# Altium PCB buck_pcb_onur.PcbDoc
Units mm, origin at the board's own origin, x right, y up, seen from the top; angles counter-clockwise.
Board outline 38.86 x 22.61 mm, 2 copper layers (Top Layer, Bottom Layer); 7 components, 5 nets, 22 pads, 0 vias.
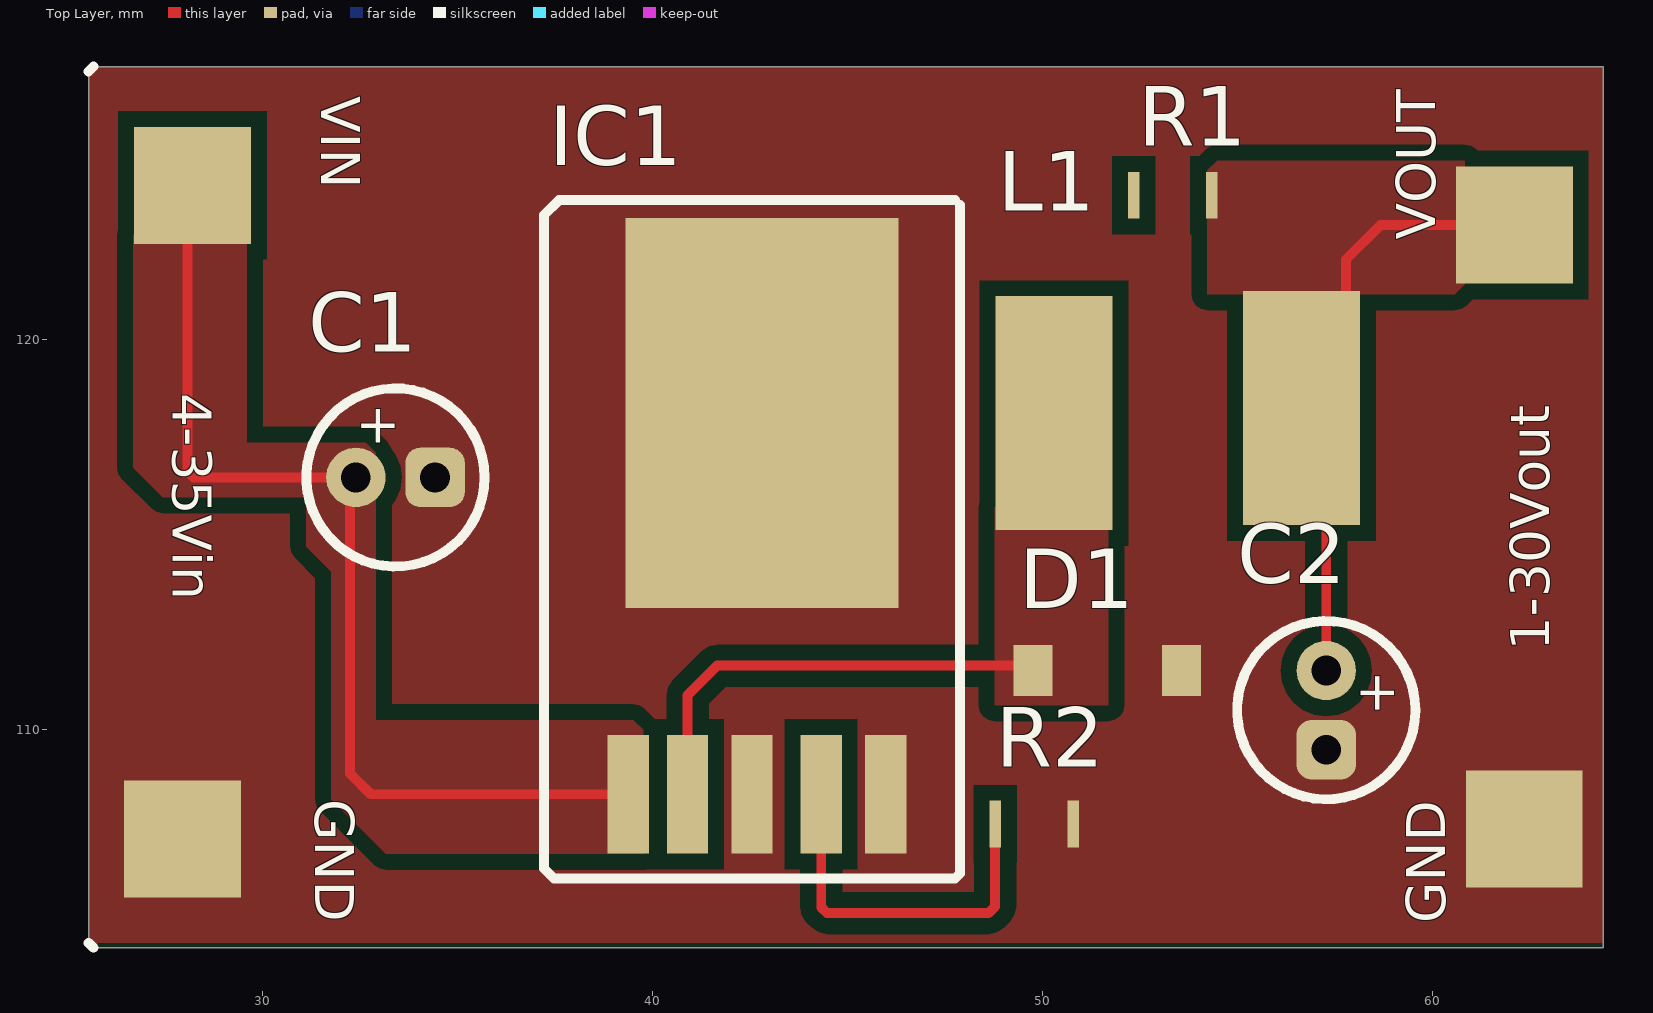
[diagram p0: Top Layer view]
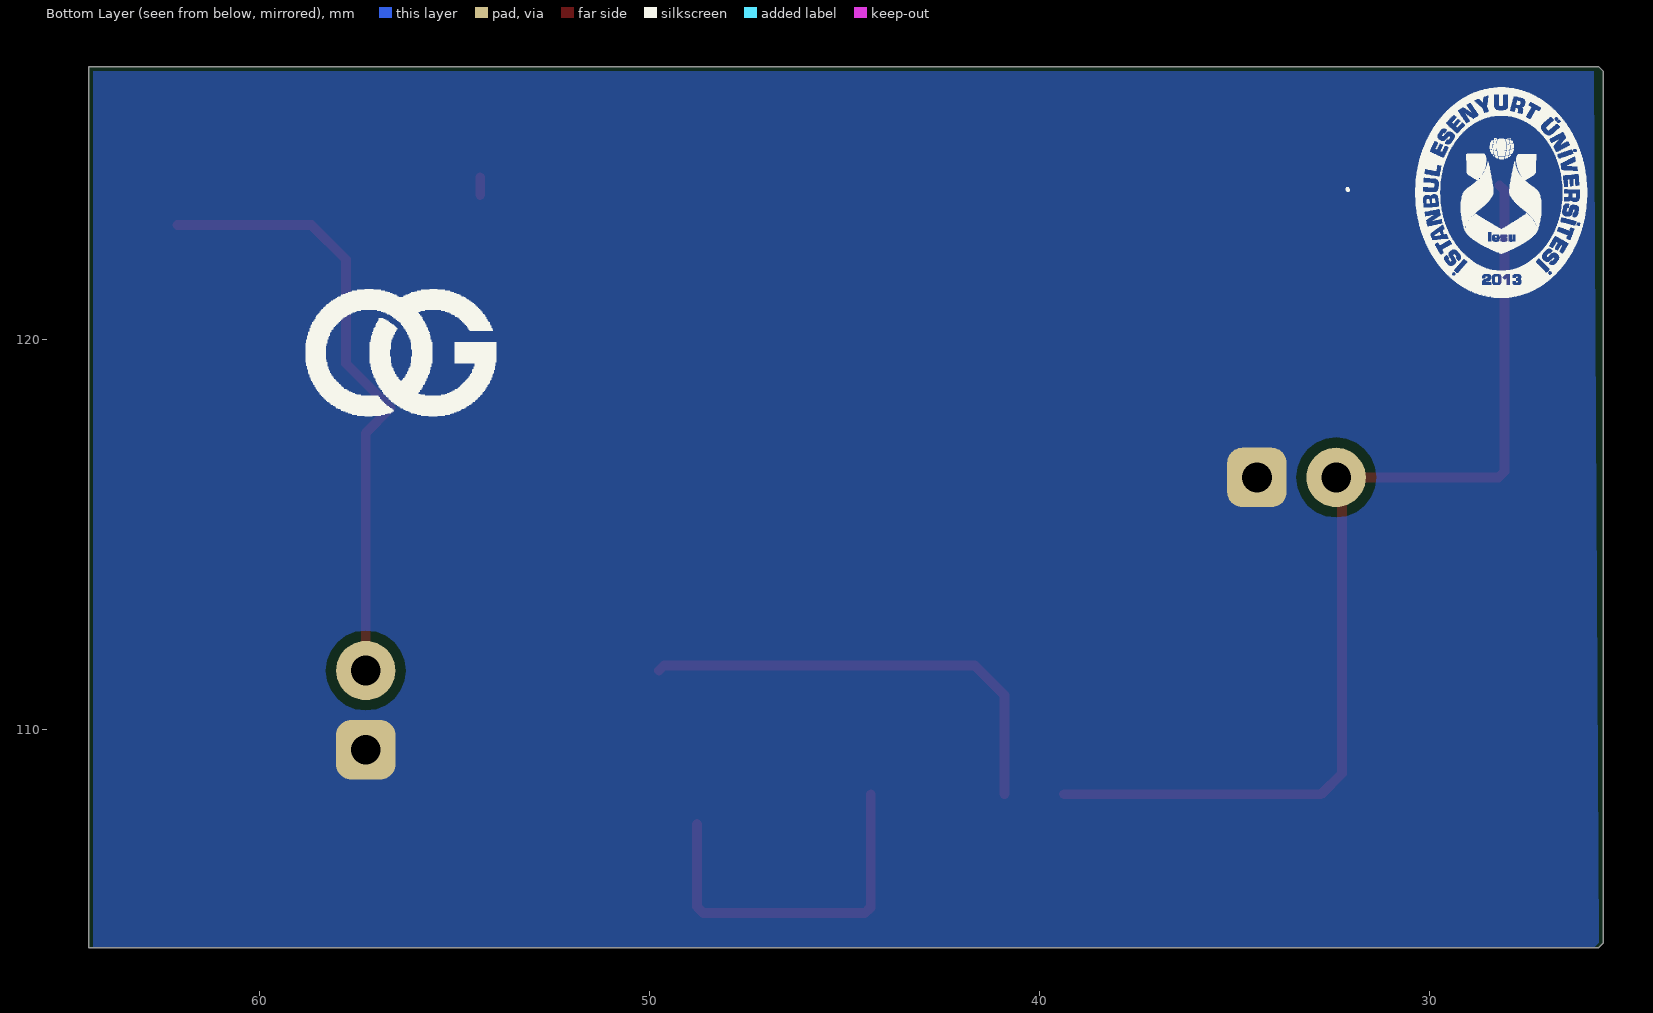
[diagram p1: Bottom Layer view, seen from below]
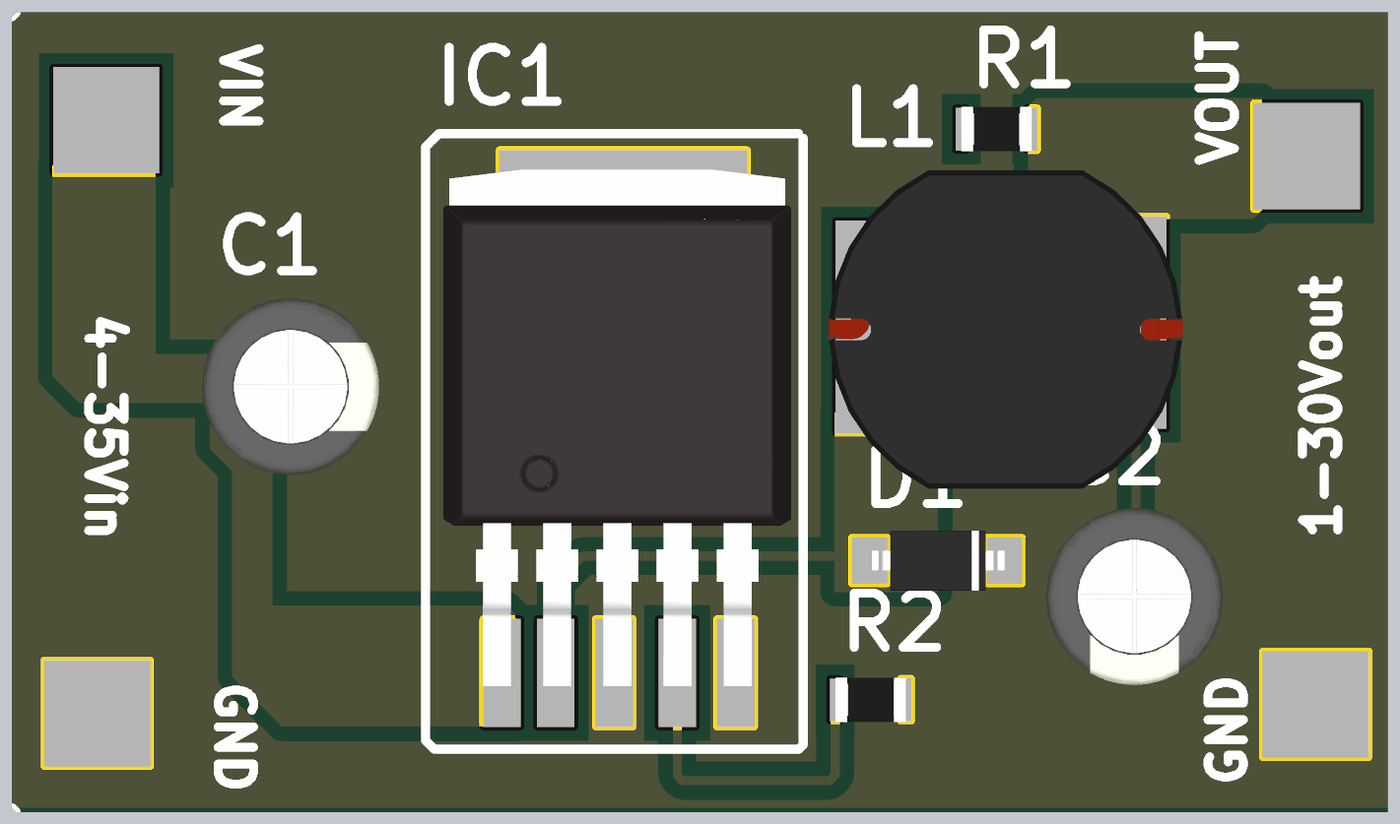
[diagram p2: 3D render of the assembled board from above, using the file's embedded part models]

## Layer stack, top to bottom
Top Solder: solder mask 0.0102, Solder Resist, Dk 3.5
Top Layer: signal copper 0.0356
Dielectric 1: dielectric 0.32, FR-4, Dk 4.8
Bottom Layer: signal copper 0.0356
Bottom Solder: solder mask 0.0102, Solder Resist, Dk 3.5

## Board outline
25.654,104.394 25.527,104.521 25.527,126.873 25.654,127 64.389,127 64.389,104.394

## Design rules (kind name [scope] priority, off if disabled: settings)
Clearance polygonclearance [InNamedPolygon('GND_L01_P010')] p1: gap=0.4 ignorepadtopadclearanceinfootprint=FALSE
Clearance Clearance_1 [All] p2: gap=0.254 ignorepadtopadclearanceinfootprint=FALSE except(0: Arc-Hole Track-Hole SMDPad-Hole THPad-Hole Via-Hole Fill-Hole Poly-Hole Region-Hole Text-Hole)
PolygonConnect [All] p1: connectstyle=Direct reliefconductorwidth=0.254 reliefentries=4 polygonreliefangle="90 Angle" airgapwidth=0.254
RoutingVias [All] p1: holewidth=0.711 width=1.27 viastyle="Through Hole" minholewidth=0.711 minwidth=1.27 maxholewidth=0.711 maxwidth=1.27
SolderMaskExpansion [All] p1: expansion=0.102
Width [All] p1: maxlimit=0.254 minlimit=0.254 preferedwidth=0.254
30 further rules are at their usual default settings.

## Classes and differential pairs
component class buck_sch: C1 C2 D1 IC1 L1 R1

## Components (designator, comment, footprint, x,y, rotation, side; value= is the part's Value field where it differs from the comment)
C1 "100uF 30V" "100uF through hole" 28.702,118.618 r0 top
C2 "220uF 35V" "100uF through hole" 59.436,115.189 r270 top
D1 "1N5822 smd" 1N5822 51.689,111.506 r180 top
IC1 "LM2596S" LM2596 42.164,113.284 r0 top
L1 "33uH" "33uH smd Inductor" 53.34,121.793 r0 top
R1 "10k 805" 805Res 53.34,123.698 r0 top
R2 "4R7 805" 805Res 49.784,107.569 r180 top

## Footprints (in the part's own frame and the unit in brackets; to place one, negate y for a bottom-side part, rotate by r counter-clockwise, add the part's x,y. Pads: shape width x height; smd on the part's side, far side on the other; paste and mask are expansions set on the pad)
1N5822 [mm]
  rect 1x1.3 smd: A(-1.875,0) K(1.935,0)
  body extent -1.87,-0.85 1.88,0.85, height 1.2
"33uH smd Inductor" [mm]
  rect 3x6 smd: 1(-3.048,-3.683) 2(3.302,-3.556)
  body extent -4.75,-8.25 5.25,0.74, height 5.44
"100uF through hole" [mil]
  round 60 hole 30: 1(145,-85)
  rrect50% 60x60 hole 30: 2(225,-85)
  silkscreen extent 95,-175 275,5, body extent 87,-185 283,12, height 433
805Res [mm]
  rect 0.3x1.2 smd: 1(-1,0) 2(1,0)
  body extent -1,-0.62 1,0.63, height 0.51
LM2596 [mm] "D2PAK"
  rect 1.06x3.05 smd: 1(-2.794,-4.953) 2(-1.27,-4.953) 3(0.381,-4.953) 4(2.159,-4.953) 5(3.81,-4.953)
  rect 7x10 smd: 3(0.635,4.826)
  silkscreen extent -4.95,-7.11 5.71,10.29, body extent -4.44,-5.33 5.38,9.27, height 4.22

## Part data
R1: library part "Resistor 10k"

## Free pads (board coordinates)
  rect 3x3 smd: 11(28.194,123.952) 12(27.94,107.188) 13(62.103,122.936) 14(62.357,107.442)

## Nets (pads, with @x,y where several pads share a name; then routed paths per layer and width w, separated by ;. In a path a pad name is that pad's centre, name@x,y a point inside that pad or via, vN(x,y) a via of type N, cw(c..) or ccw(c..) an arc to the next point about the centre after c; other vN are vias at no path point)
GND: C1.2 C2.2 D1.A IC1.3 IC1.5 pad.12 pad.14 R2.1
NetD1_K: D1.K IC1.2 L1.1 | length 11.8
  Top Layer w0.254: IC1.2 40.894,110.871 41.656,111.633 49.627,111.633 D1.K
NetIC1_4: IC1.4 R2.2 | length 9.6
  Top Layer w0.254: IC1.4 44.323,105.432 44.472,105.283 48.619,105.283 48.784,105.448 R2.2
Vin: C1.1 IC1.1 pad.11 | length 26.8
  Top Layer w0.254: pad.11 28.067,123.825 28.067,116.608 28.216,116.459 C1.1 32.236,116.31 32.236,108.861 32.766,108.331 IC1.1
Vout: C2.1 L1.2 pad.13 R1.2 | length 16.4
  Top Layer w0.254: R1.2 R1.2@54.34,124.148 ; C2.1 57.277,117.602 L1.2 57.785,119.38 57.785,122.047 58.674,122.936 pad.13
pads on no net: R1.1

## Polygon pours and split planes (outlines as drawn)
GND on Top Layer "GND_L01_P010" (solid, pour order 10): 25.527,127 64.389,127 64.389,104.521 25.781,104.521 25.527,104.267
Vout on Top Layer "VOUT_L01_P008" (solid, pour order 8): 54.229,121.158 54.229,124.333 54.483,124.587 60.833,124.587 60.833,121.412 60.579,121.158
Vin on Top Layer "VIN_L01_P006" (solid, pour order 6): 39.878,106.807 33.147,106.807 31.75,108.204 31.75,114.046 31.115,114.681 31.115,115.951 27.432,115.951 26.67,116.713 26.67,122.682 29.464,122.682 29.591,122.809 29.591,117.348 32.639,117.348 32.893,117.094 32.893,110.236 39.497,110.236 39.751,109.982
NetD1_K on Top Layer "NETD1_K_L01_P002" (solid, pour order 2): 51.689,110.617 51.689,115.57 51.816,115.697 48.768,115.697 48.768,110.617
GND on Bottom Layer "GND_L02_P016" (solid, pour order 16): 25.781,126.873 64.262,126.873 64.262,104.394 25.781,104.394 25.654,104.521

## Silkscreen, mask and mechanical layers (free items; w line width, h text height)
Top Overlay:
  lines w0.254: 25.527,104.521 25.654,104.394 ; 25.527,126.873 25.654,127
  text "Vin" at 65.024,144.653 h1 r270
  text "Vin" at 30.776,144.295 h1 r270
  text "VIN" at 31.496,126.238 h1 r270
  text "VOUT" at 60.071,122.555 h1 r90
  text "4-35Vin" at 27.686,118.618 h1 r270
  text "1-30Vout" at 62.992,112.014 h1 r90
  text "GND" at 31.342,108.204 h1 r270
  text "GND" at 60.325,105.029 h1 r90
Bottom Overlay:
  drawing of 34 lines, arcs and shapes, not listed
  text "DC-DC Buck Converter                            Designed by OnurGnllu" at 62.357,122.682 h1

## Dimensions
25.527,129.032 to 64.389,128.778 on Mechanical 1

## Text inside footprints (layer, text, board x,y; h text height)
C1: Top Overlay "+" at 32.385,117.348 h1
C2: Top Overlay "+" at 58.166,111.506 h1 r270